# Altium PCB Mis - ICSP conector.PcbDoc
Units mm, origin at the board's own origin, x right, y up, seen from the top; angles counter-clockwise.
Board outline 152.4 x 101.6 mm, 2 copper layers (Top Layer, Bottom Layer); 4 components, 8 nets, 16 pads, 0 vias.
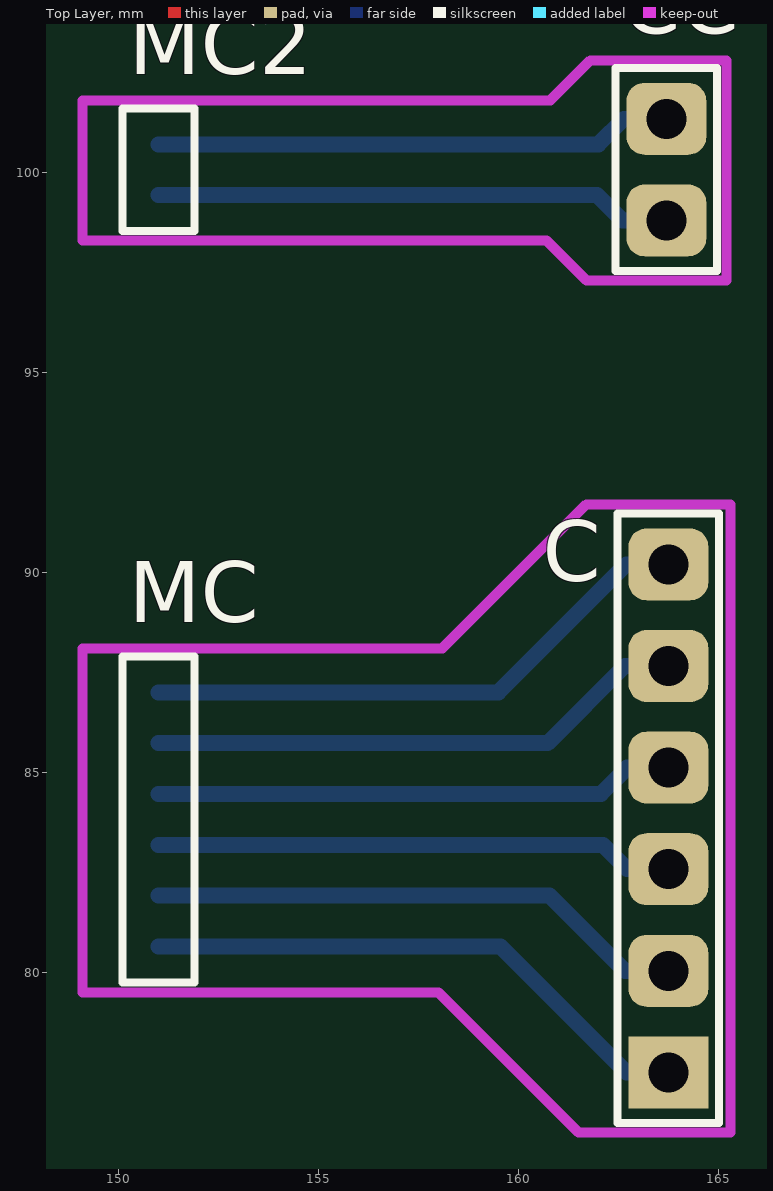
[diagram p0: Top Layer view]
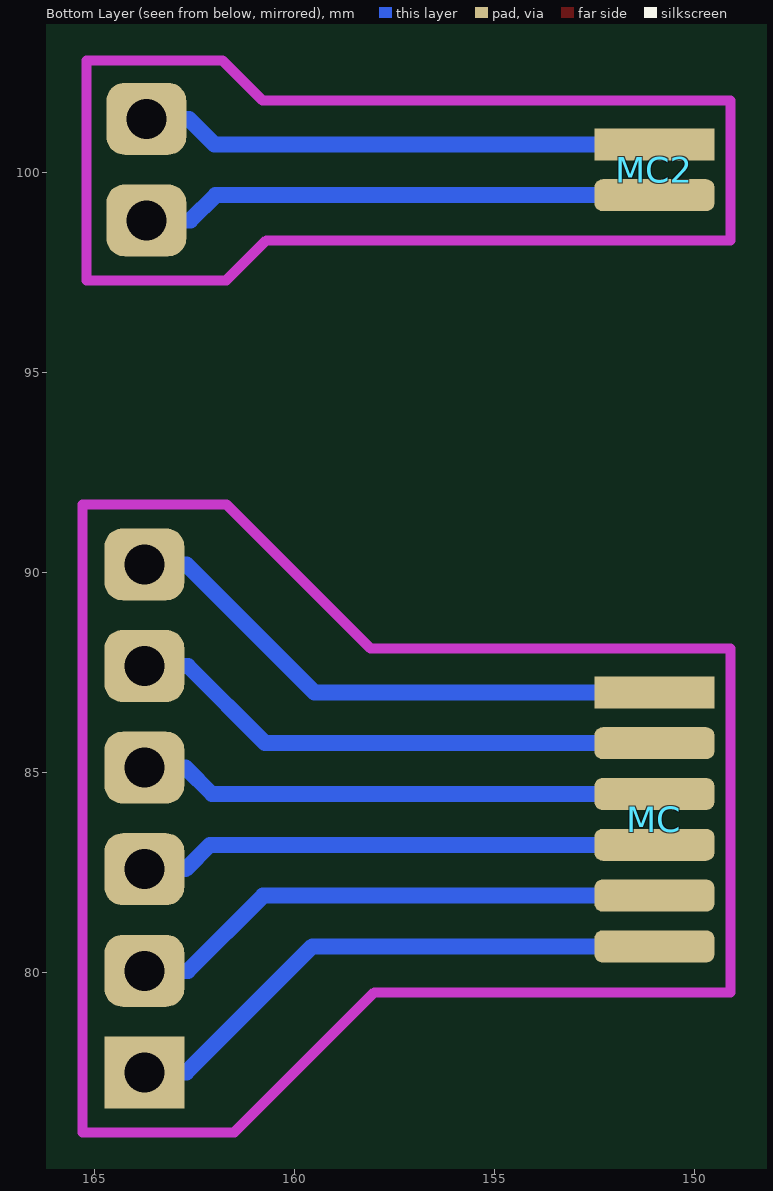
[diagram p1: Bottom Layer view, seen from below]

## Layer stack, top to bottom
Top Layer: signal copper 0.0356
Dielectric: dielectric 0.32, FR-4, Dk 4.8
Bottom Layer: signal copper 0.0356

## Board outline
25.4,25.4 177.8,25.4 177.8,127 25.4,127

## Design rules (kind name [scope] priority, off if disabled: settings)
Clearance [All] p1: gap=0.25
PolygonConnect [All] p1: connectstyle=Relief reliefconductorwidth=0.254 reliefentries=4 polygonreliefangle="90 Angle" airgapwidth=0.254
RoutingVias [All] p1: holewidth=0.711 width=1.27 viastyle="Through Hole" minholewidth=0.711 minwidth=1.27 maxholewidth=0.711 maxwidth=1.27
SolderMaskExpansion [All] p1: expansion=0.102
Width [All] p1: maxlimit=5 minlimit=0.25 preferedwidth=0.3 minimp=50.000000 maximp=50.000000 favimp=50.000000
28 further rules are at their usual default settings.

## Components (designator, comment, footprint, x,y, rotation, side; value= is the part's Value field where it differs from the comment)
C "Header 6" HDR1X6 163.75,77.5 r90 top
CC "Header 2" HDR1X2 163.7,98.8 r90 top
MC "MHDR1X6" MHDR1X6 151,87 r270 top
MC2 "MHDR1X2" MHDR1X2 151,100.7 r270 top

## Footprints (in the part's own frame and the unit in brackets; to place one, negate y for a bottom-side part, rotate by r counter-clockwise, add the part's x,y. Pads: shape width x height; smd on the part's side, far side on the other; paste and mask are expansions set on the pad)
HDR1X2 [mm] "Connector; Header; 2 Position"
  rrect50% 1.8x2 hole 1: 1(0,0) 2(2.54,0)
  silkscreen extent -1.27,-1.27 3.81,1.27
HDR1X6 [mm] "Connector; Header; 6 Position"
  rect 1.8x2 hole 1: 1(0,0)
  rrect50% 1.8x2 hole 1: 2(2.54,0) 3(5.08,0) 4(7.62,0) 5(10.16,0) 6(12.7,0)
  silkscreen extent -1.27,-1.27 13.97,1.27
MHDR1X2 [mm] "Connector; Header; 2 Position"
  rect 0.8x3 smd far side: 1(0,0)
  rrect50% 0.8x3 smd far side: 2(1.27,0)
  silkscreen extent -0.9,-0.9 2.17,0.9
MHDR1X6 [mm] "Connector; Header; 6 Position"
  rect 0.8x3 smd far side: 1(0,0)
  rrect50% 0.8x3 smd far side: 2(1.27,0) 3(2.54,0) 4(3.81,0) 5(5.08,0) 6(6.35,0)
  silkscreen extent -0.9,-0.9 7.25,0.9

## Part data
C MC: "Header, 6-Pin"
CC MC2: "Header, 2-Pin"

## Nets (pads, with @x,y where several pads share a name; then routed paths per layer and width w, separated by ;. In a path a pad name is that pad's centre, name@x,y a point inside that pad or via, vN(x,y) a via of type N, cw(c..) or ccw(c..) an arc to the next point about the centre after c; other vN are vias at no path point)
ICSP1: C.1 MC.6 | length 14.1
  Bottom Layer w0.4: MC.6 159.55,80.65 162.7,77.5 C.1
ICSP2: C.2 MC.5 | length 13.5
  Bottom Layer w0.4: MC.5 160.78,81.92 162.66,80.04 C.2
ISCP3: C.3 MC.4 | length 13
  Bottom Layer w0.4: MC.4 162.11,83.19 162.72,82.58 C.3
ISCP4: C.4 MC.3 | length 13
  Bottom Layer w0.4: MC.3 162.06,84.46 162.72,85.12 C.4
ISCP5: C.5 MC.2 | length 13.5
  Bottom Layer w0.4: MC.2 160.73,85.73 162.66,87.66 C.5
ISCP6: C.6 MC.1 | length 14.1
  Bottom Layer w0.4: MC.1 159.5,87 162.7,90.2 C.6
POWER1: CC.1 MC2.2 | length 13
  Bottom Layer w0.4: MC2.2 161.97,99.43 162.6,98.8 CC.1
POWER2: CC.2 MC2.1 | length 13
  Bottom Layer w0.4: MC2.1 162,100.7 162.64,101.34 CC.2

## Keep-outs
Keep-Out Layer:
  lines w0.25: 149.1,79.5 149.1,88.1
  lines w0.254: 149.1,79.5 158,79.5 161.5,76 165.3,76 165.3,91.7 161.7,91.7 158.1,88.1 149.1,88.1 ; 149.1,98.3 149.1,101.8 160.8,101.8 161.8,102.8 165.2,102.8 165.2,97.3 161.7,97.3 160.7,98.3 149.1,98.3